# Altium PCB MODULIQ_TDC.PcbDoc (part 1 of 2)
Units mm, origin at the board's own origin, x right, y up, seen from the top; angles counter-clockwise.
Board outline 49.15 x 76.65 mm, 4 copper layers (L1, P2, L3, L4), stack 1.512 mm thick; 110 components, 101 nets, 467 pads, 506 vias.
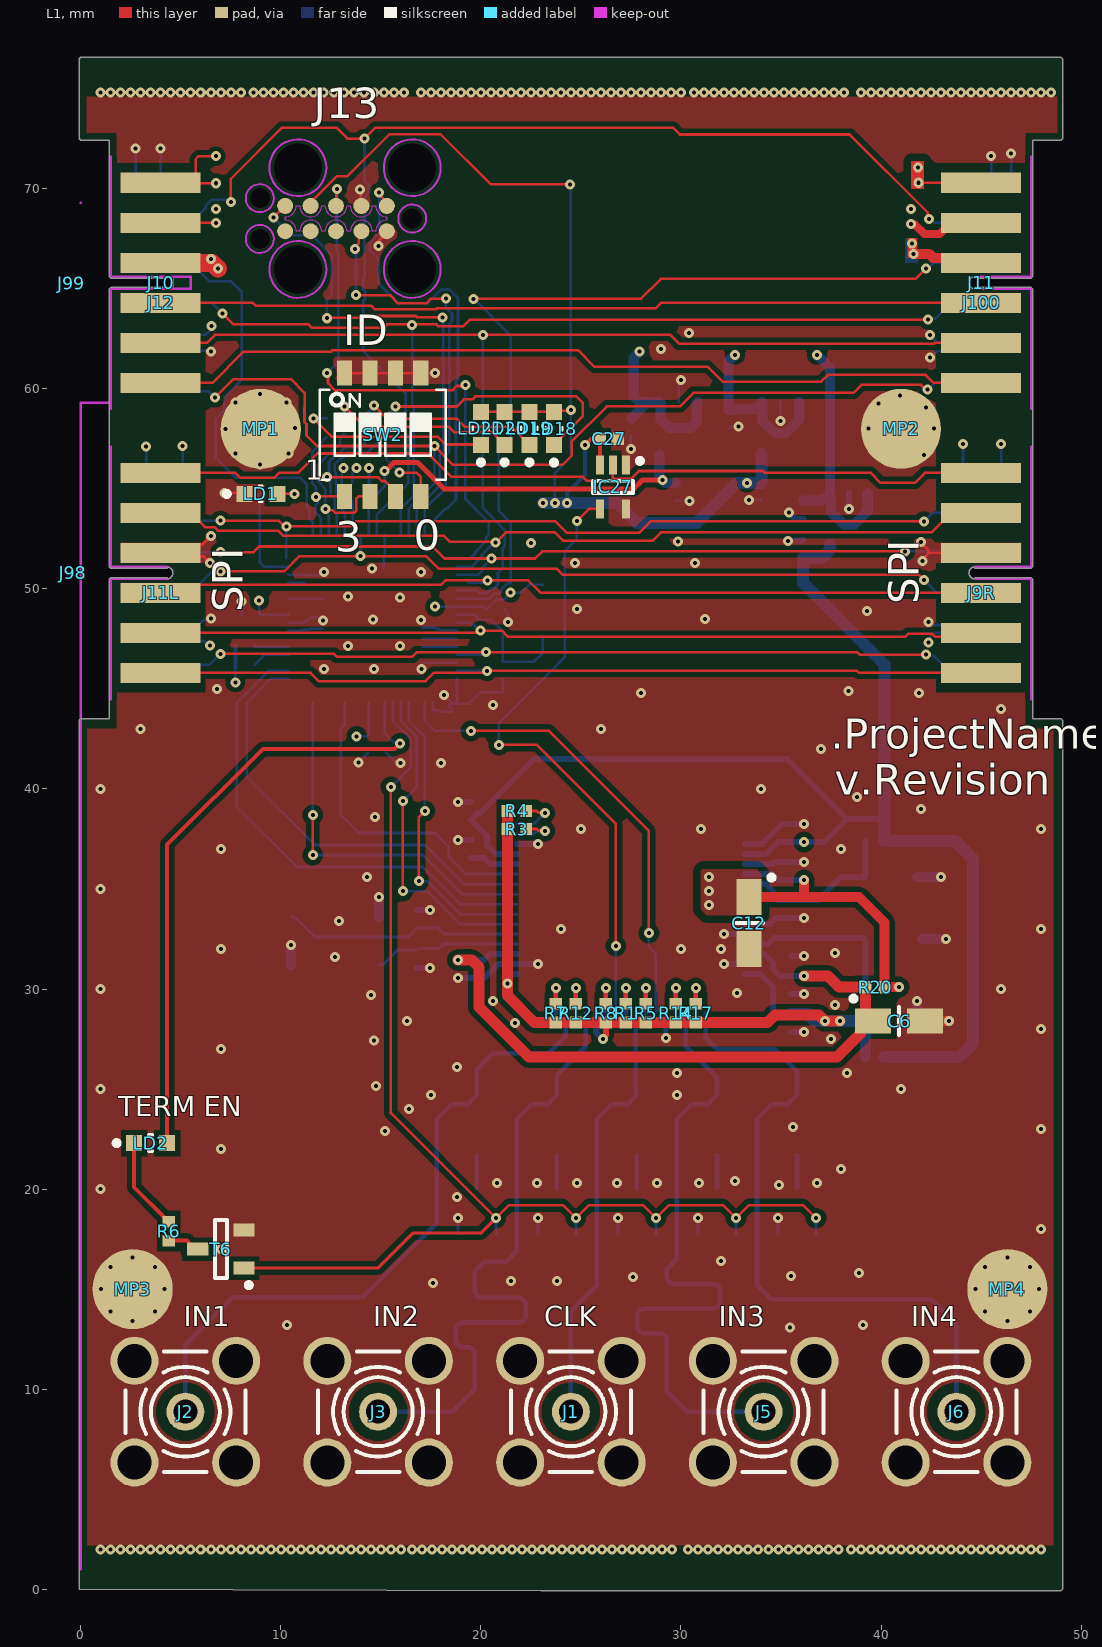
[diagram p0: L1 view]
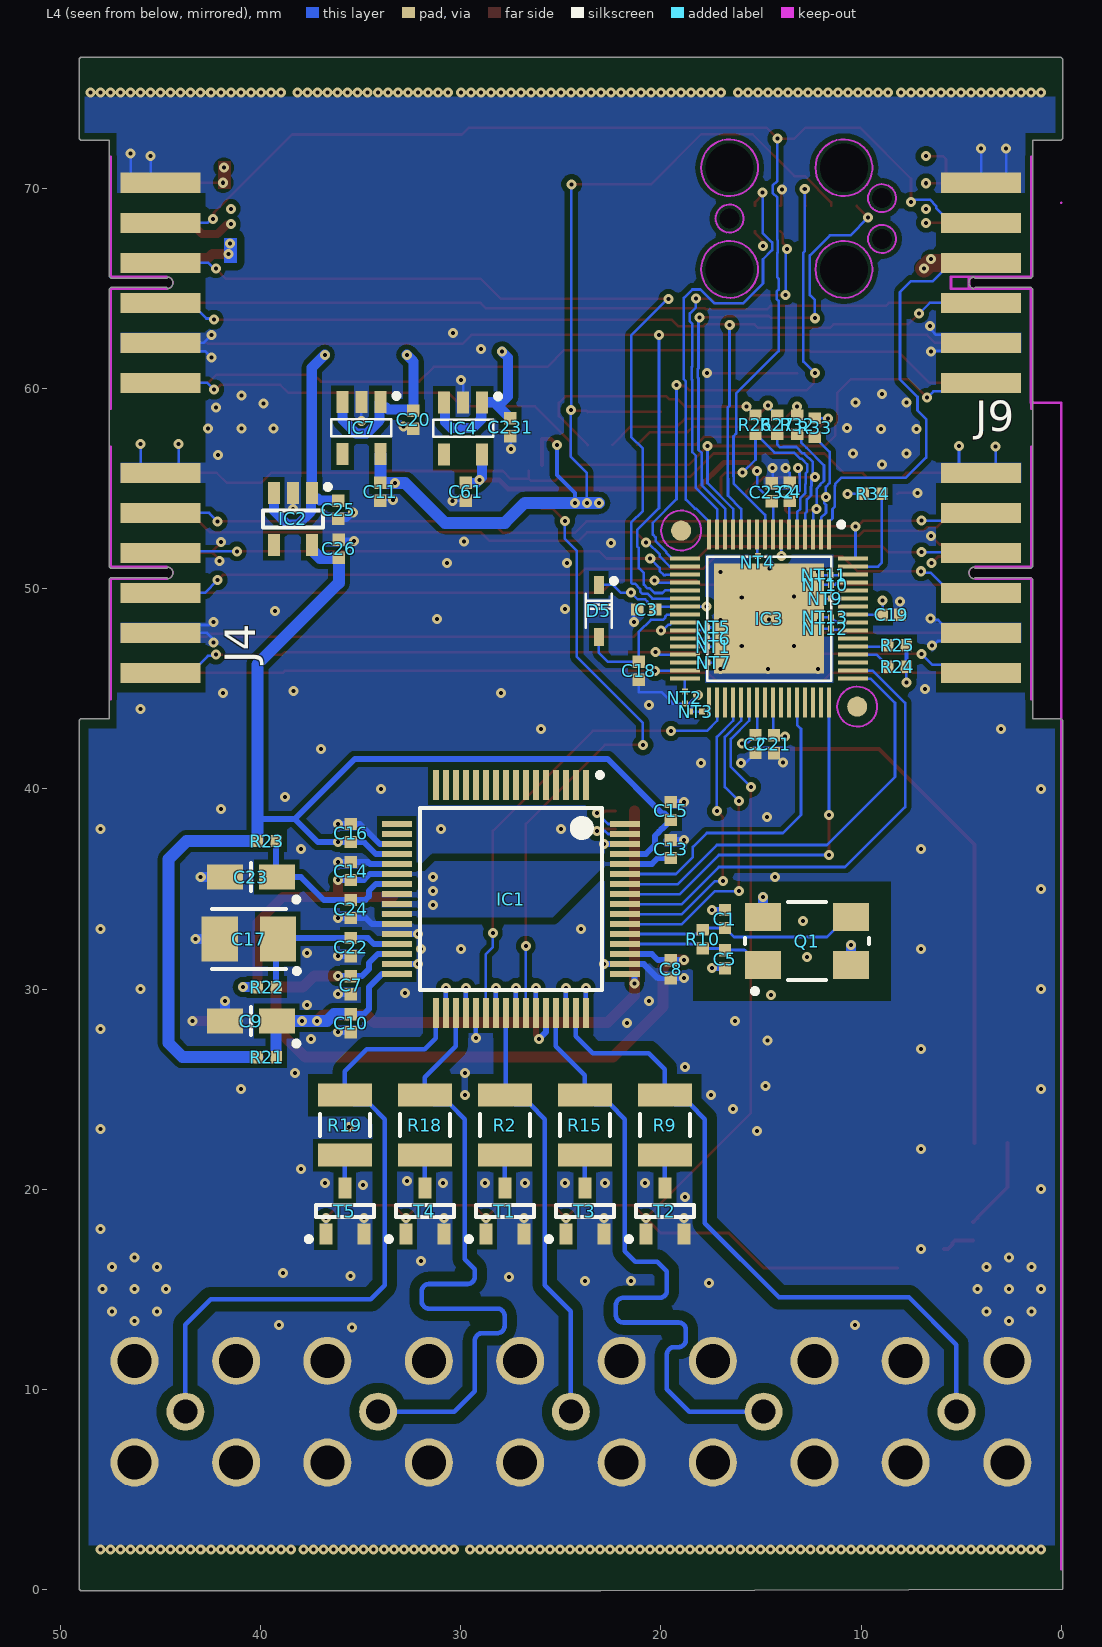
[diagram p1: L4 view, seen from below]
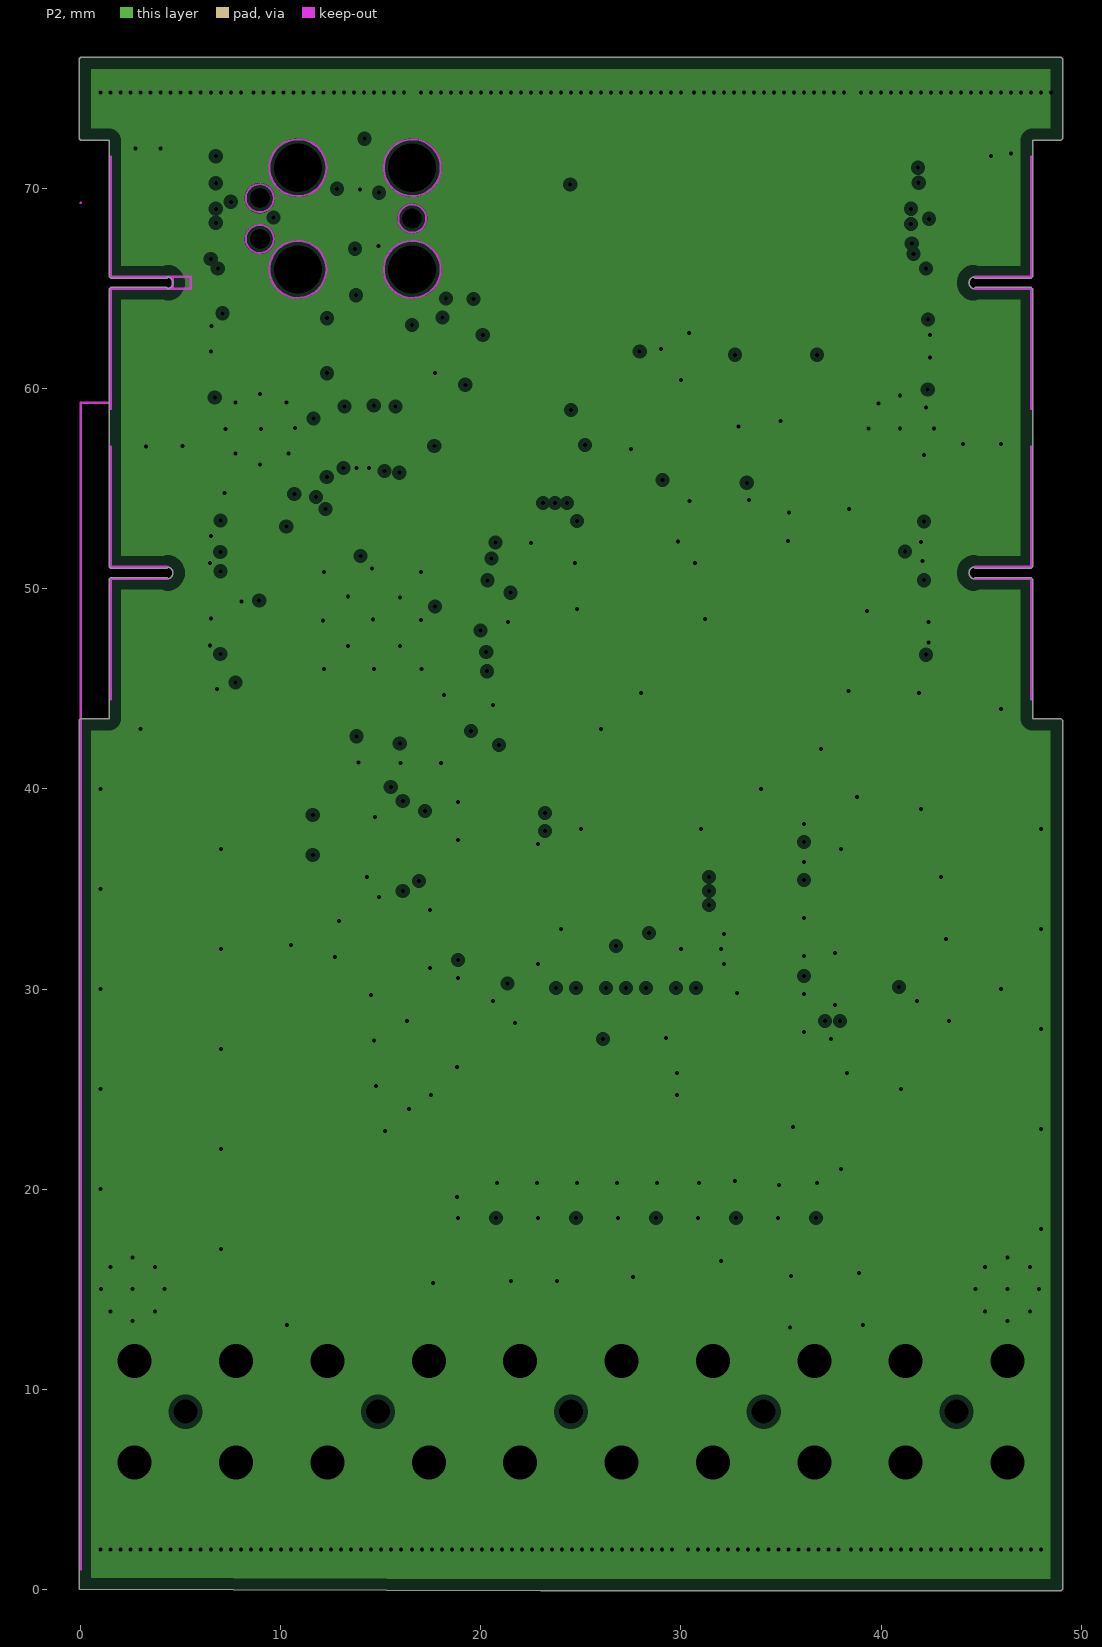
[diagram p2: P2, clearances drawn from the general rule]
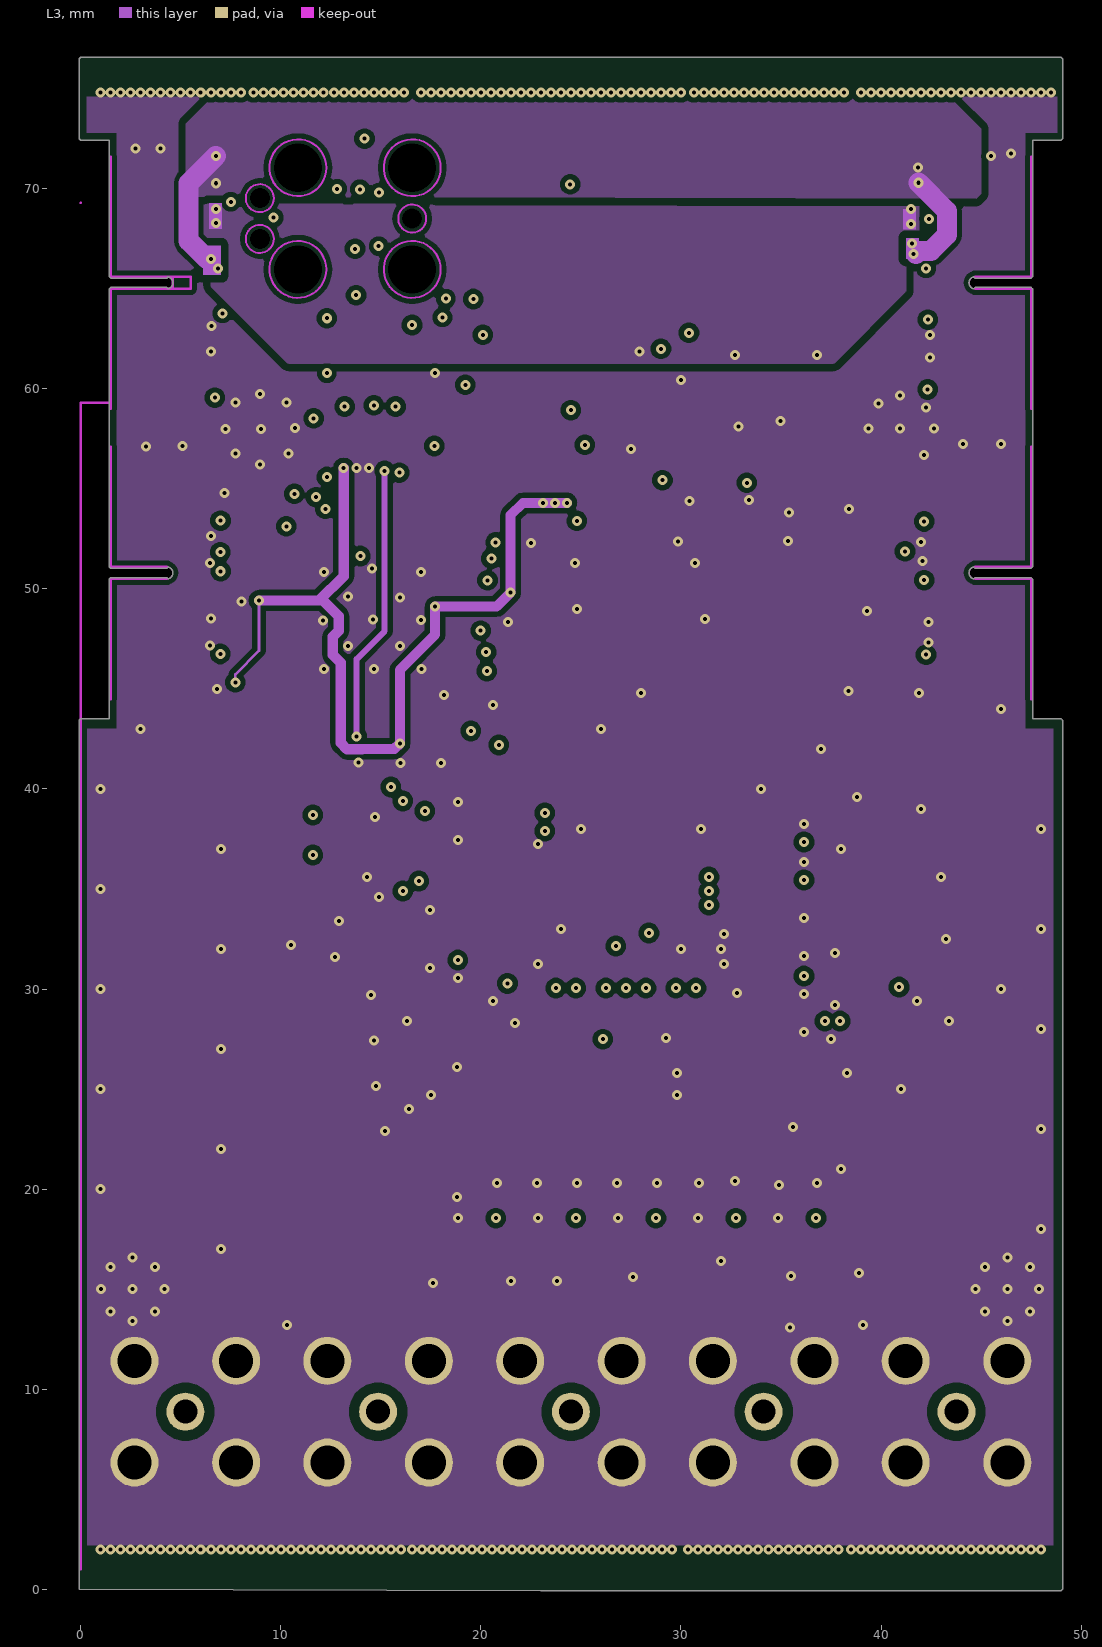
[diagram p3: L3]
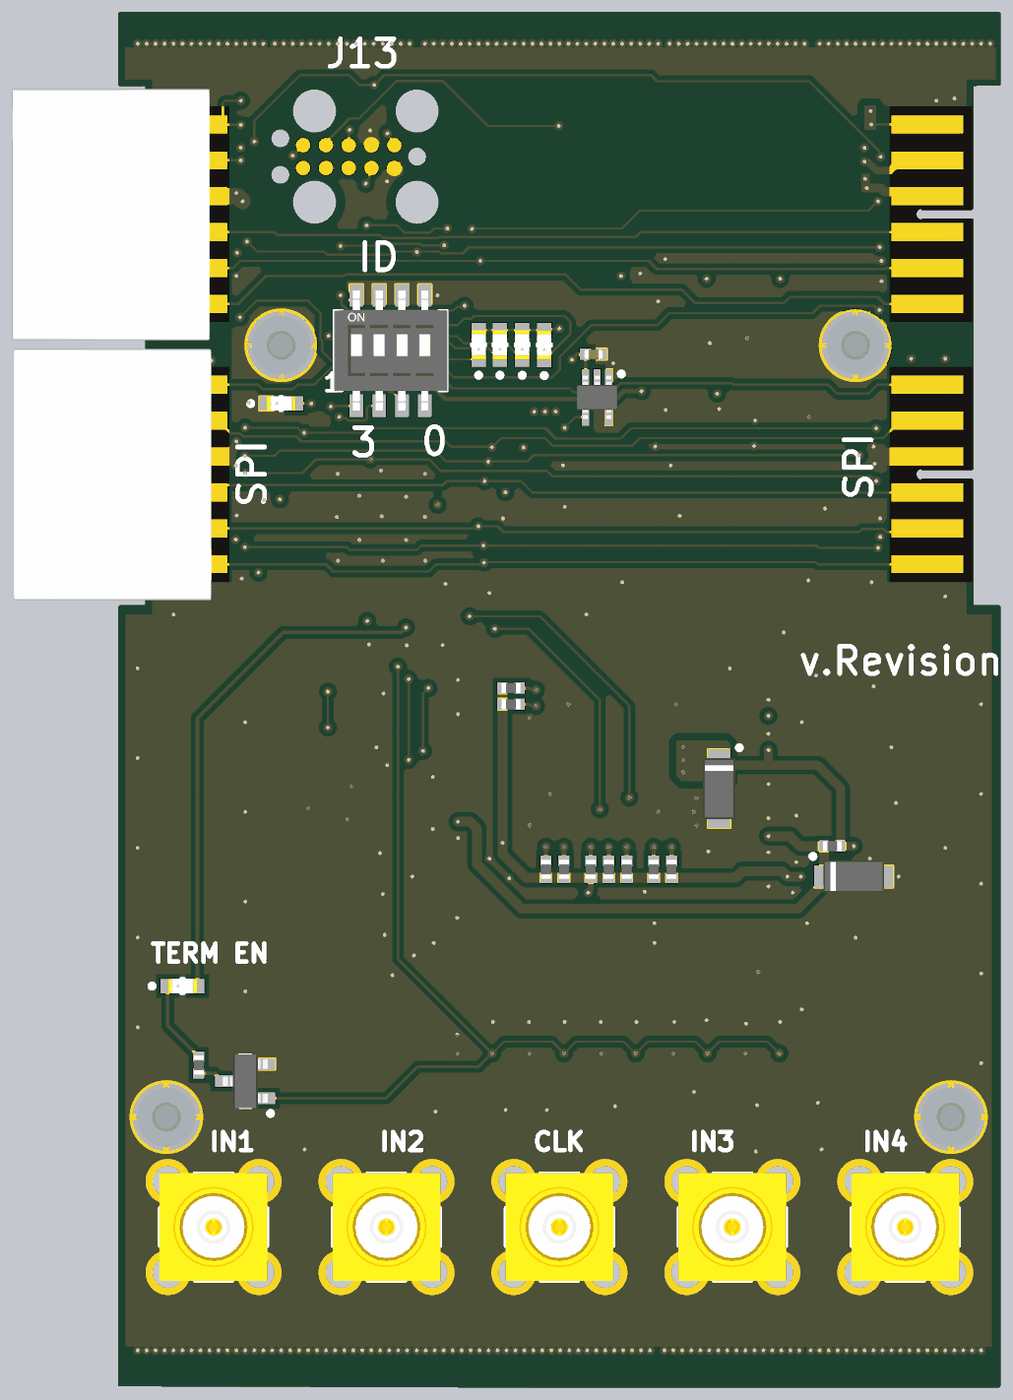
[diagram p5: 3D render of the assembled board from above, using the file's embedded part models]
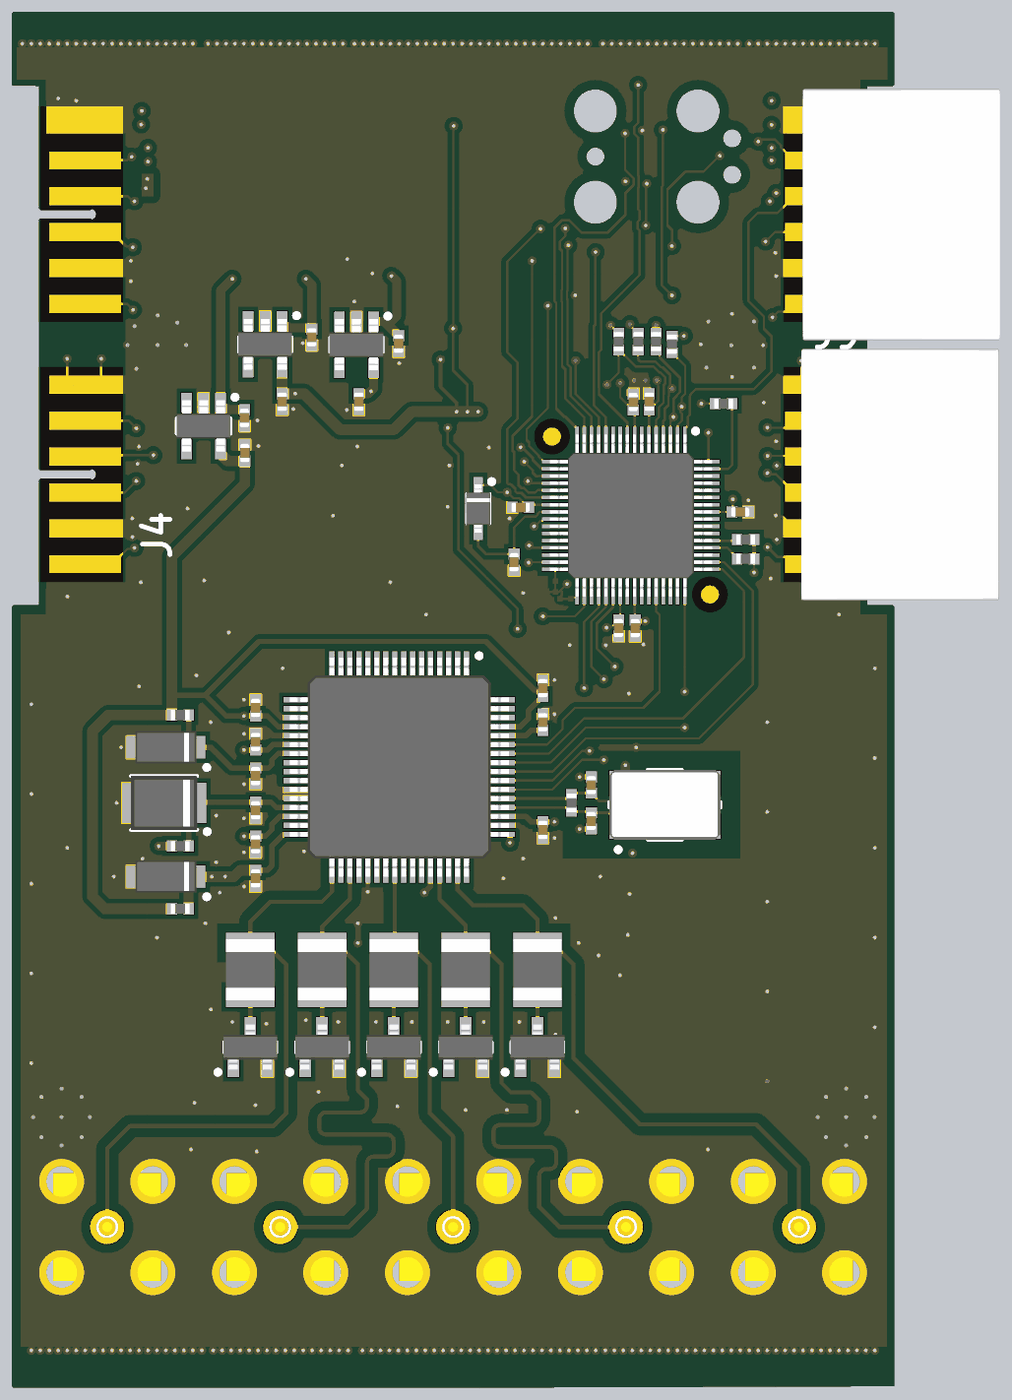
[diagram p6: 3D render of the assembled board from below, using the file's embedded part models]

## Layer stack, top to bottom
TopSolder: solder mask 0.025, Solder Resist, Dk 3.7
L1: signal copper 0.035
Dielectric1: core 0.138, FR-4, Dk 4.3
P2: plane copper 0.018, net GND
Dielectric3: core 1.13, FR-4, Dk 4.6
L3: signal copper 0.018
Dielectric5: core 0.138, FR-4, Dk 4.3
L4: signal copper 0.035
BottomSolder: solder mask 0.025, Solder Resist, Dk 3.7

## Board outline
-0.077,0 -0.077,43.44 0,43.517 1.423,43.517 1.423,50.49 1.5,50.567 4.3,50.567 4.375,50.505 ccw(c4.3,50.8) 4.605,50.8 ccw(c4.3,50.8) 4.375,51.095 4.3,51.033 1.5,51.033 1.423,51.11 1.423,57.1 1.423,64.99 1.5,65.067 4.3,65.067 4.375,65.005 ccw(c4.3,65.3) 4.605,65.3 ccw(c4.3,65.3) 4.375,65.595 4.3,65.533 1.5,65.533 1.423,65.61 1.423,72.423 0,72.423 -0.077,72.5 -0.077,76.5 0,76.577 49,76.577 49.077,76.5 49.077,72.5 49,72.423 47.577,72.423 47.577,65.61 47.5,65.533 44.7,65.533 44.625,65.595 ccw(c44.7,65.3) 44.625,65.005 44.7,65.067 47.5,65.067 47.577,64.99 47.577,59 47.577,51.11 47.5,51.033 44.7,51.033 44.625,51.095 ccw(c44.7,50.8) 44.625,50.505 44.7,50.567 47.5,50.567 47.577,50.49 47.577,43.517 49,43.517 49.077,43.44 49.077,0 49,-0.077 23,-0.077

## Design rules (kind name [scope] priority, off if disabled: settings)
Clearance Clearance_DIFF [(InDifferentialPairClass('All Differential Pairs'))] p1: gap=0.127 ignorepadtopadclearanceinfootprint=FALSE except(0: Arc-Hole Track-Hole SMDPad-Hole THPad-Hole Via-Hole Fill-Hole Poly-Hole Region-Hole Text-Hole; 0.254: Arc-Poly Track-Poly SMDPad-Poly THPad-Poly Via-Poly Fill-Poly Poly-Poly Poly-Region Poly-Text)
Clearance Clearance_S50 [InNetClass('S50')] p2: gap=0.127 ignorepadtopadclearanceinfootprint=FALSE except(0: Arc-Hole Track-Hole SMDPad-Hole THPad-Hole Via-Hole Fill-Hole Poly-Hole Region-Hole Text-Hole; 0.254: Poly-Region Poly-Text; 0.5: Arc-Poly Track-Poly SMDPad-Poly THPad-Poly Via-Poly Fill-Poly Poly-Poly)
Clearance [All] p3: gap=0.127 ignorepadtopadclearanceinfootprint=FALSE except(0: Arc-Hole Track-Hole SMDPad-Hole THPad-Hole Via-Hole Fill-Hole Poly-Hole Region-Hole Text-Hole; 0.254: Arc-Poly Track-Poly SMDPad-Poly Via-Poly; 0.381: THPad-Poly Fill-Poly Poly-Poly)
ComponentClearance [All] p1 off: gap=0.254 collisioncheckmode=3 verticalgap=0.254 showdistances=FALSE
DiffPairsRouting [All] p1: maxlimit=0.254 minlimit=0.127 mostfreqgap=0.127 toplayer_minwidth=0.127 toplayer_maxwidth=0.381 toplayer_prefwidth=0.254 midlayer1_minwidth=0.127 midlayer1_maxwidth=0.381 midlayer1_prefwidth=0.254 bottomlayer_minwidth=0.127 bottomlayer_maxwidth=0.381 bottomlayer_prefwidth=0.254 maxuncoupledlength=12.7
FabricationTestPointUsage TestPointUsage [All] p1: valid=0 allowmultiple=FALSE
FabricationTestpoint Testpoint [All] p1: side=3 testpointundercomponent=TRUE minsize=1.016 maxsize=2.54 preferedsize=1.524 minholesize=0.508 maxholesize=1.016 preferedholesize=0.813 testpointgrid=0.025 allowsidetop=TRUE allowsidebottom=TRUE usegrid=TRUE gridtolerance=0
Height [All] p1 off: minheight=0 maxheight=25.4 prefheight=12.7
HoleSize [All] p1: absolutevalues=TRUE maxlimit=3.81 minlimit=0.025 maxpercent=80.000 minpercent=20.000
HoleToHoleClearance [All] p1: gap=0.025 allowstackedmicrovias=TRUE
MatchedLengths MatchedLengths_TDC_IN [InNetClass('TDC_IN')] p1: tolerance=25.4 checknetsindiffpair=FALSE checkdiffpairvsdiffpair=TRUE checkxsignals=TRUE checkothers=TRUE usedelayunits=TRUE delaytolerance=10.000000
MinimumSolderMaskSliver [All] p1: minsoldermaskwidth=0
PlaneClearance [All] p1: clearance=0.254
PlaneConnect [All] p1: planeconnectstyle=Direct reliefexpansion=0.508 reliefentries=4 reliefconductorwidth=0.254 reliefairgap=0.254
PolygonConnect [All] p1: connectstyle=Direct reliefconductorwidth=0.254 reliefentries=4 polygonreliefangle="45 Angle" airgapwidth=0.254
RoutingVias [All] p1: holewidth=0.2 width=0.5 viastyle="Through Hole" minholewidth=0.2 minwidth=0.5 maxholewidth=1 maxwidth=2
SilkToSilkClearance [All] p1: silktosilkclearance=0
SilkToSolderMaskClearance SilkscreenOverComponentPads [IsPad] p1: minsilkscreentomaskgap=0 clearancetoexposedcopper=TRUE
SolderMaskExpansion [All] p1: expansion=0.051 istentingtop=FALSE
SupplyNets "Schematic Supply Nets_4" [InNet('DVDD33')] p1: voltage=0.000
SupplyNets "Schematic Supply Nets_2" [InNet('TVDD33')] p2: voltage=0.000
SupplyNets "Schematic Supply Nets_12" [InNet('P3V3')] p3: voltage=0.000
SupplyNets "Schematic Supply Nets" [InNet('P1V8')] p4: voltage=0.000
SupplyNets "Schematic Supply Nets_5" [InNet('GND')] p5: voltage=0.000
SupplyNets "Schematic Supply Nets_3" [InNet('P5V0')] p6: voltage=0.000
SupplyNets "Schematic Supply Nets_1" [InNet('P12V0')] p7: voltage=0.000
Width Width_S50 [InNetClass('S50')] p1: maxlimit=0.254 minlimit=0.23 preferedwidth=0.254 toplayer_maxwidth=0.23 toplayer_prefwidth=0.23 bottomlayer_maxwidth=0.23 bottomlayer_prefwidth=0.23 impedanceprofiledriven=TRUE impedanceprofileid={5AEEC51B-A12F-4C33-835D-7C136164C65C} impedanceprofilevalue=50.000000 minimp=50.000000 maximp=50.000000 favimp=50.000000
Width [All] p2: maxlimit=1.27 minlimit=0.127 preferedwidth=0.127
18 further rules are at their usual default settings.

## Classes and differential pairs
net class TDC_IN: TDC_STOP1 TDC_STOP2 TDC_STOP3 TDC_STOP4
net class S50: TDC_REFCLK TDC_STOP1 TDC_STOP2 TDC_STOP3 TDC_STOP4
component class MODULIQ_TDC: C1 C5 C6 C7 C8 C9 C10 C12 C13 C14 C15 C16 C17 C22 C23 C24 C27 IC1 IC27 J1 J2 J3 J5 J6 LD2 Q1 R1 R2 R3 R4 R5 R6 R7 R8 R9 R10 R12 R14 R15 R17 R18 R19 R20 R21 R22 R23 R24 R25 T1 T2 T3 T4 T5 T6
component class U_SPI_IFC: C2 C3 C4 C11 C18 C19 C20 C21 C25 C26 C61 C231 C232 D5 IC2 IC3 IC4 IC7 J4 J9 J9R J10 J11 J11L J12 J13 J98 J99 J100 LD1 LD18 LD19 LD20 LD21 MP1 MP2 MP3 MP4 NT1 NT2 NT3 NT4 NT5 NT6 NT7 NT9 NT10 NT11 NT12 NT13 R26 R27 R32 R33 R34 SW2

## Components (designator, comment, footprint, x,y, rotation, side; value= is the part's Value field where it differs from the comment)
C1 "18pF" CAPC1005X55N 16.8,33.5 r270 bottom
C2 "1uF" CAPC1005X55N 15.275,42.248 r90 bottom
C3 "1uF" CAPC1005X55N 20.741,48.97 r180 bottom
C4 "1uF" CAPC1005X55N 13.57,54.85 r270 bottom
C5 "18pF" CAPC1005X55N 16.8,31.5 r90 bottom
C6 "100uF" CAPMP3216X180N 40.9,28.4 r0 top
C7 "100nF" CAPC1005X55N 35.5,30.2 r90 bottom
C8 "100nF" CAPC1005X55N 19.5,31 r90 bottom
C9 "33uF" CAPMP3216X180N 40.5,28.4 r0 bottom
C10 "100nF" CAPC1005X55N 35.5,28.3 r90 bottom
C11 "1uF" CAPC1005X55N 34.019,54.85 r90 bottom
C12 "100uF" CAPMP3216X180N 33.4,33.3 r270 top
C13 "100nF" CAPC1005X55N 19.5,37 r270 bottom
C14 "100nF" CAPC1005X55N 35.5,35.9 r270 bottom
C15 "100nF" CAPC1005X55N 19.5,38.9 r270 bottom
C16 "100nF" CAPC1005X55N 35.5,37.8 r270 bottom
C17 "220uF" CAPMP3528X210N 40.6,32.5 r0 bottom
C18 "1uF" CAPC1005X55N 21.1,45.915 r90 bottom
C19 "1uF" CAPC1005X55N 8.5,48.715 r0 bottom
C20 "1uF" CAPC1005X55N 32.372,58.447 r90 bottom
C21 "1uF" CAPC1005X55N 14.35,42.238 r90 bottom
C22 "100nF" CAPC1005X55N 35.5,32.1 r90 bottom
C23 "33uF" CAPMP3216X180N 40.5,35.6 r0 bottom
C24 "100nF" CAPC1005X55N 35.5,34 r90 bottom
C25 "1uF" CAPC1005X55N 36.12,53.953 r90 bottom
C26 "1uF" CAPC1005X55N 36.1,52 r270 bottom
C27 "100nF" CAPC1005X55N 26.4,57.5 r180 top
C61 "1uF" CAPC1005X55N 29.752,54.85 r90 bottom
C231 "1uF" CAPC1005X55N 27.535,58.083 r90 bottom
C232 "1uF" CAPC1005X55N 14.46,54.835 r270 bottom
D5 "BAT165" SOD2512X110N 23.1,48.9 r270 bottom
IC1 "TDC-GPX2 FLQM" QFP50P1200X1200X160-64N 27.5,34.5 r270 bottom locked
IC2 "AP2112K-3.3TRG1" SOT95P285X140-5N 38.4,53.5 r270 bottom
IC3 "5M160ZE64A5N" QFP40P900X900X120-65N-S550 14.588,48.515 r270 bottom locked
IC4 "AP2112K-1.8TRG1" SOT95P285X140-5N 29.886,58.025 r270 bottom
IC7 "AP2112K-3.3TRG1" SOT95P285X140-5N 34.969,58.05 r270 bottom
IC27 "SN74LVC1G125DCKT" SOT65P210X110-5N 26.6,55.1 r270 top
J1 "MCX" AMPHENOL_919-109J-51PX 24.5,8.875 r0 top locked
J2 "MCX" AMPHENOL_919-109J-51PX 5.23,8.875 r0 top locked
J3 "MCX" AMPHENOL_919-109J-51PX 14.865,8.875 r0 top locked
J4 "" EDGE12T1B6_P200W1000L0F100X400 45,50.8 r270 bottom
J5 "MCX" AMPHENOL_919-109J-51PX 34.135,8.875 r0 top locked
J6 "MCX" AMPHENOL_919-109J-51PX 43.77,8.875 r0 top locked
J9 "" EDGE12T5B10_P200W1000L0F100X400 4,50.8 r90 bottom
J9R "" EDGE10T5B10_P200W1000L0F100X400 45,45.8 r90 top
J10 "" EDGE12T1B6_P200W1000L0F100X400 4,65.3 r270 top
J11 "" EDGE12T5B10_P200W1000L0F100X400 45,65.3 r90 top
J11L "" EDGE10T1B6_P200W1000L0F100X400 4,53.8 r270 top
J12 "" EDGE10T1B6_P200W1000L0F100X400 4,68.3 r270 top
J13 "TC2050-IDC" TC2050-IDC 12.76,68.51 r180 top
J98 "" AVX_009159012761916 -0.4,50.8 r180 top
J99 "" AVX_009159012761916 -0.475,65.275 r0 top
J100 "" EDGE10T5B10_P200W1000L0F100X400 45,60.3 r90 top
LD1 "Green" LED_KINGBRIGHT_KP-1608CGCK 9,54.75 r0 top
LD2 "Green" LED_KINGBRIGHT_KP-1608CGCK 3.5,22.3 r0 top
LD18 "Green" LED_KINGBRIGHT_KP-1608CGCK 23.656,58.013 r90 top
LD19 "Green" LED_KINGBRIGHT_KP-1608CGCK 22.427,58.028 r90 top
LD20 "Green" LED_KINGBRIGHT_KP-1608CGCK 21.185,58.028 r90 top
LD21 "Green" LED_KINGBRIGHT_KP-1608CGCK 20,58.028 r90 top
MP1 "M1.6 x 3mm" 97730306330 9,58 r0 top
MP2 "M1.6 x 3mm" 97730306330 41,58 r0 top
MP3 "M1.6 x 3mm" 97730306330 2.6,15 r0 top
MP4 "M1.6 x 3mm" 97730306330 46.315,15 r0 top
NT1 "Net Tie" "Net Tie 3" 17.688,47.115 r180 bottom net-tie
NT2 "Net Tie" "Net Tie 3" 18.808,44.865 r270 bottom net-tie
NT3 "Net Tie" "Net Tie 3" 17.95,43.865 r0 bottom net-tie
NT4 "Net Tie" "Net Tie 3" 15.156,51.642 r270 bottom net-tie
NT5 "Net Tie" "Net Tie 3" 17.688,48.072 r180 bottom net-tie
NT6 "Net Tie" "Net Tie 3" 17.688,47.515 r180 bottom net-tie
NT7 "Net Tie" "Net Tie 3" 17.67,46.315 r180 bottom net-tie
NT9 "Net Tie" "Net Tie 3" 11.488,49.515 r0 bottom net-tie
NT10 "Net Tie" "Net Tie 3" 11.488,50.2 r0 bottom net-tie
NT11 "Net Tie" "Net Tie 3" 11.525,50.685 r0 bottom net-tie
NT12 "Net Tie" "Net Tie 3" 11.488,48.015 r0 bottom net-tie
NT13 "Net Tie" "Net Tie 3" 11.488,48.575 r0 bottom net-tie
Q1 "10MHZ" XTAL_ABRACON_ABMM2 12.7,32.4 r90 bottom
R1 "100k" RESC1005X40N 27.25,28.8 r270 top
R2 "49R9" RESC3225X70N 27.8,23.2 r90 bottom
R3 "100k" RESC1005X40N 21.8,38 r180 top
R4 "100k" RESC1005X40N 21.8,38.9 r180 top
R5 "100k" RESC1005X40N 28.25,28.8 r270 top
R6 "3k3" RESC1005X40N 4.4,17.9 r270 top
R7 "100k" RESC1005X40N 23.75,28.8 r270 top
R8 "100k" RESC1005X40N 26.25,28.8 r270 top
R9 "49R9" RESC3225X70N 19.8,23.2 r90 bottom
R10 "1M" RESC1005X40N 17.9,32.5 r270 bottom
R12 "100k" RESC1005X40N 24.75,28.8 r270 top
R14 "100k" RESC1005X40N 29.75,28.8 r270 top
R15 "49R9" RESC3225X70N 23.8,23.2 r90 bottom
R17 "100k" RESC1005X40N 30.75,28.8 r270 top
R18 "49R9" RESC3225X70N 31.8,23.2 r90 bottom
R19 "49R9" RESC3225X70N 35.8,23.2 r90 bottom
R20 "10" RESC1005X40N 39.7,30.1 r180 top
R21 "10" RESC1005X40N 39.7,26.6 r180 bottom
R22 "10" RESC1005X40N 39.7,30.1 r180 bottom
R23 "10" RESC1005X40N 39.7,37.4 r180 bottom
R24 "3k3" RESC1005X40N 8.2,46.1 r0 bottom
R25 "3k3" RESC1005X40N 8.2,47.175 r0 bottom
R26 "3k3" RESC1005X40N 15.275,58.205 r270 bottom
R27 "3k3" RESC1005X40N 14.185,58.205 r270 bottom
R32 "3k3" RESC1005X40N 13.19,58.205 r270 bottom
R33 "3k3" RESC1005X40N 12.303,58.052 r270 bottom
R34 "3k3" RESC1005X40N 9.425,54.75 r180 bottom
SW2 "Switch" SW_OMRON_A6H-4102 15.095,57.705 r90 top
T1 "2N7002" SOT95P240X130-3N 27.8,18.9 r90 bottom
T2 "2N7002" SOT95P240X130-3N 19.8,18.9 r90 bottom
T3 "2N7002" SOT95P240X130-3N 23.8,18.9 r90 bottom
T4 "2N7002" SOT95P240X130-3N 31.8,18.9 r90 bottom
T5 "2N7002" SOT95P240X130-3N 35.8,18.9 r90 bottom
T6 "2N7002" SOT95P240X130-3N 7,17 r180 top

## Footprints (in the part's own frame and the unit in brackets; to place one, negate y for a bottom-side part, rotate by r counter-clockwise, add the part's x,y. Pads: shape width x height; smd on the part's side, far side on the other; paste and mask are expansions set on the pad)
97730306330 [mm] "SMT Steel Spacer with internal Thread M1.6 Bottom closed, height 3mm"
  round 4 smd paste-2539.97: 1(0,0)
  body extent -1.65,-1.65 1.65,1.65, height 3
AMPHENOL_919-109J-51PX [mm] "50 Ohm, RF Connector, MCX Straight PCB Receptacle Jack"
  round 1.9 hole 1.2: 1(0,0)
  round 2.4 hole 1.7: 2(-2.54,-2.54) 2(-2.54,2.54) 2(2.54,-2.54) 2(2.54,2.54)
  silkscreen extent -3,-3 3,3, body extent -3,-3 3,3, height 6.06
AVX_009159012761916 [mm] "12 Contacts, 2mm Pitch, Open Ended Card Edge Connector, 9159 Series"
  body extent -5.5,-7 5.5,7, height 2.9
CAPC1005X55N [mm] "Capacitor, Non-Polarized, Chip; 1.00mm L X 0.50mm W X 0.70mm H, IPC Medium Density"
  rect 0.62x0.62 smd: 1(-0.45,0) 2(0.45,0)
  body extent -0.52,-0.27 0.53,0.28, height 0.55
CAPMP3216X180N [mm] "Capacitor, Polarized, Molded  Body 3.2x1.6mm, IPC Medium Density"
  rect 1.8x1.25 smd: 1(-1.3,0) 2(1.3,0)
  silkscreen extent -2.4,-0.7 0,1.25, body extent -1.7,-0.9 1.7,0.9, height 1.6
CAPMP3528X210N [mm] "Capacitor, Polarized, Molded  Body 3.5x2.8mm, IPC Medium Density"
  rect 1.8x2.25 smd: 1(-1.45,0) 2(1.45,0)
  silkscreen extent -2.52,-1.5 1.85,1.72, body extent -1.85,-1.5 1.85,1.5, height 2.1
EDGE10T1B6_P200W1000L0F100X400 [mm] "10 contacts Board Edge Connector, First Left Top Pad 1, First Left Bottom Pad 2, Pitch 2mm, Length 0mm, Width 10mm, Finger Lenght 4mm, Finger Width 1mm"
  rect 1x4 smd paste-0.5: 1(0,0) 2(2,0) 3(4,0) 4(6,0) 5(8,0)
  rect 1x4 smd far side paste-0.5: 6(0,0) 7(2,0) 8(4,0) 9(6,0) 10(8,0)
  KeepOutLayer lines w0.05: 3.3,0.3 ccw(c3,0.3) 2.7,0.3
  KeepOutLayer lines w0.13: 9,-2.5 3.3,-2.5 3.3,0.3 ; -1,-2.5 2.7,-2.5 2.7,0.3
EDGE10T5B10_P200W1000L0F100X400 [mm] "10 contacts Board Edge Connector, First Left Top Pad 5, First Left Bottom Pad 10, Pitch 2mm, Length 0mm, Width 10mm, Finger Lenght 4mm, Finger Width 1mm"
  rect 1x4 smd paste-0.5: 1(8,0) 2(6,0) 3(4,0) 4(2,0) 5(0,0)
  rect 1x4 smd far side paste-0.5: 6(8,0) 7(6,0) 8(4,0) 9(2,0) 10(0,0)
  KeepOutLayer lines w0.05: 4.7,0.3 cw(c5,0.3) 5.3,0.3
  KeepOutLayer lines w0.13: 4.7,0.3 4.7,-2.5 -1,-2.5 ; 5.3,0.3 5.3,-2.5 9,-2.5
EDGE12T1B6_P200W1000L0F100X400 [mm] "12 contacts Board Edge Connector, First Left Top Pad 1, First Left Bottom Pad 2, Pitch 2mm, Length 0mm, Width 12.5mm, Finger Lenght 4mm, Finger Width 1mm"
  rect 1x4 smd paste-0.5: 1(-5,0) 2(-3,0) 3(-1,0) 4(1,0) 5(3,0) 6(5,0)
  rect 1x4 smd far side paste-0.5: 7(-5,0) 8(-3,0) 9(-1,0) 10(1,0) 11(3,0) 12(5,0)
  KeepOutLayer lines w0.05: 0.3,0.3 ccw(c0,0.3) -0.3,0.3
  KeepOutLayer lines w0.13: 0.3,0.3 0.3,-2.5 6.3,-2.5 ; -0.3,0.3 -0.3,-2.5 -6.3,-2.5
EDGE12T5B10_P200W1000L0F100X400 [mm] "12 contacts Board Edge Connector, First Left Top Pad 5, First Left Bottom Pad 10, Pitch 2mm, Length 0mm, Width 12.5mm, Finger Lenght 4mm, Finger Width 1mm"
  rect 1x4 smd paste-0.5: 1(5,0) 2(3,0) 3(1,0) 4(-1,0) 5(-3,0) 6(-5,0)
  rect 1x4 smd far side paste-0.5: 7(5,0) 8(3,0) 9(1,0) 10(-1,0) 11(-3,0) 12(-5,0)
  KeepOutLayer lines w0.05: -0.3,0.3 cw(c0,0.3) 0.3,0.3
  KeepOutLayer lines w0.13: -6.3,-2.5 -0.3,-2.5 -0.3,0.3 ; 6.3,-2.5 0.3,-2.5 0.3,0.3
LED_KINGBRIGHT_KP-1608CGCK [mm] "SMT Green LED, Case 0603, Body L 1.60mm x W 0.80mm x H 1.10mm"
  rect 0.8x0.8 smd: 1(-0.825,0) 2(0.825,0)
  silkscreen extent -1.82,-0.4 0.08,0.4, body extent -0.8,-0.4 0.8,0.4, height 1.1
"Net Tie 3" [mm] "SMD Net Tie"
  rect 0.3x0.3 smd paste-2539.97 mask-0.064: 1(0,0) 2(0.6,0)
  L1 lines w0.13: 0.6,0 0,0
QFP40P900X900X120-65N-S550 [mm] "QFP, 0.40mm Pitch, Square; 64 Pin, 7.00mm L X 7.00mm W X 1.20mm H Body (w/Thermal Tab), IPC Medium Density"
  rect 1.5x0.2 smd: 1(-4.2,3) 2(-4.2,2.6) 3(-4.2,2.2) 4(-4.2,1.8) 5(-4.2,1.4) 6(-4.2,1) 7(-4.2,0.6) 8(-4.2,0.2) 9(-4.2,-0.2) 10(-4.2,-0.6) 11(-4.2,-1) 12(-4.2,-1.4) 13(-4.2,-1.8) 14(-4.2,-2.2) 15(-4.2,-2.6) 16(-4.2,-3) 33(4.2,-3) 34(4.2,-2.6) 35(4.2,-2.2) 36(4.2,-1.8) 37(4.2,-1.4) 38(4.2,-1) 39(4.2,-0.6) 40(4.2,-0.2) 41(4.2,0.2) 42(4.2,0.6) 43(4.2,1) 44(4.2,1.4) 45(4.2,1.8) 46(4.2,2.2) 47(4.2,2.6) 48(4.2,3)
  rect 0.2x1.5 smd: 17(-3,-4.2) 18(-2.6,-4.2) 19(-2.2,-4.2) 20(-1.8,-4.2) 21(-1.4,-4.2) 22(-1,-4.2) 23(-0.6,-4.2) 24(-0.2,-4.2) 25(0.2,-4.2) 26(0.6,-4.2) 27(1,-4.2) 28(1.4,-4.2) 29(1.8,-4.2) 30(2.2,-4.2) 31(2.6,-4.2) 32(3,-4.2) 49(3,4.2) 50(2.6,4.2) 51(2.2,4.2) 52(1.8,4.2) 53(1.4,4.2) 54(1,4.2) 55(0.6,4.2) 56(0.2,4.2) 57(-0.2,4.2) 58(-0.6,4.2) 59(-1,4.2) 60(-1.4,4.2) 61(-1.8,4.2) 62(-2.2,4.2) 63(-2.6,4.2) 64(-3,4.2)
  rect 5.5x5.5 smd: 65(0,0)
  round 1 smd paste-0.51 mask+0.5: FTG1(-4.4,-4.4) FTG2(4.4,4.4)
  L1 keep-out circle w0.1: c4.4,4.4 r1
  L1 keep-out circle w0.1: c-4.4,-4.4 r1
  silkscreen extent -4.82,-3.1 3.1,3.72, body extent -4.52,-4.52 4.52,4.52, height 1.2
QFP50P1200X1200X160-64N [mm] "QFP, 0.50mm Pitch, Square; 16 Pin X 16 Pin, 10.00mm X 10.00mm X 1.60mm Body, IPC Medium Density"
  rect 1.5x0.3 smd: 1(-5.7,3.75) 2(-5.7,3.25) 3(-5.7,2.75) 4(-5.7,2.25) 5(-5.7,1.75) 6(-5.7,1.25) 7(-5.7,0.75) 8(-5.7,0.25) 9(-5.7,-0.25) 10(-5.7,-0.75) 11(-5.7,-1.25) 12(-5.7,-1.75) 13(-5.7,-2.25) 14(-5.7,-2.75) 15(-5.7,-3.25) 16(-5.7,-3.75) 33(5.7,-3.75) 34(5.7,-3.25) 35(5.7,-2.75) 36(5.7,-2.25) 37(5.7,-1.75) 38(5.7,-1.25) 39(5.7,-0.75) 40(5.7,-0.25) 41(5.7,0.25) 42(5.7,0.75) 43(5.7,1.25) 44(5.7,1.75) 45(5.7,2.25) 46(5.7,2.75) 47(5.7,3.25) 48(5.7,3.75)
  rect 0.3x1.5 smd: 17(-3.75,-5.7) 18(-3.25,-5.7) 19(-2.75,-5.7) 20(-2.25,-5.7) 21(-1.75,-5.7) 22(-1.25,-5.7) 23(-0.75,-5.7) 24(-0.25,-5.7) 25(0.25,-5.7) 26(0.75,-5.7) 27(1.25,-5.7) 28(1.75,-5.7) 29(2.25,-5.7) 30(2.75,-5.7) 31(3.25,-5.7) 32(3.75,-5.7) 49(3.75,5.7) 50(3.25,5.7) 51(2.75,5.7) 52(2.25,5.7) 53(1.75,5.7) 54(1.25,5.7) 55(0.75,5.7) 56(0.25,5.7) 57(-0.25,5.7) 58(-0.75,5.7) 59(-1.25,5.7) 60(-1.75,5.7) 61(-2.25,5.7) 62(-2.75,5.7) 63(-3.25,5.7) 64(-3.75,5.7)
  silkscreen extent -6.32,-4.55 4.55,4.57, body extent -6.1,-6.1 6.1,6.1, height 1.6
RESC1005X40N [mm] "Chip Resistor, EIA 0402, Metric 1005, Body 1.0x0.5mm, IPC Medium Density"
  rect 0.58x0.62 smd: 1(-0.47,0) 2(0.47,0)
  body extent -0.52,-0.27 0.53,0.28, height 0.4
RESC3225X70N [mm] "Chip Resistor, EIA 1210, Metric 3225, Body 3.2x2.5mm, IPC Medium Density"
  rect 1.15x2.7 smd: 1(-1.5,0) 2(1.5,0)
  silkscreen extent -0.55,-1.25 0.55,1.25, body extent -1.7,-1.35 1.7,1.35, height 0.7
SOD2512X110N [mm] "Small Outline Diode (SOD-323), 1.70mm W X 1.25mm L X 1.10mm H body,  IPC Medium Density"
  rect 0.9x0.5 smd: 1(-1.3,0) 2(1.3,0)
  silkscreen extent -1.62,-0.65 0.85,0.87, body extent -1.35,-0.67 1.35,0.68, height 1.1
SOT65P210X110-5N [mm] "SOT353, SC70-5, SOT, 0.65mm Pitch, 5 Pin, 1.25mm W X 2.00mm L X 1.10mm H, IPC Medium Density"
  rect 0.95x0.4 smd: 1(-1.1,0.65) 2(-1.1,0) 3(-1.1,-0.65) 4(1.1,-0.65) 5(1.1,0.65)
  silkscreen extent -1.42,-1 0.3,1.48, body extent -1.2,-1.1 1.2,1.1, height 1.1
SOT95P240X130-3N [mm] "SOT23 3-Leads, Pitch 0.95mm - Body 1.3x2.9mm, IPC Medium Density"
  rect 1.05x0.65 smd: 1(-1.15,0.95) 2(-1.15,-0.95) 3(1.15,0)
  silkscreen extent -1.52,-1.45 0.3,1.92, body extent -1.25,-1.5 1.25,1.5, height 1.3
SOT95P285X140-5N [mm] "SOT23, 5-Leads, Body 3.00x2.85mm, Pitch 0.95mm, IPC Medium Density"
  rect 1.1x0.6 smd: 1(-1.3,0.95) 2(-1.3,0) 3(-1.3,-0.95) 4(1.3,-0.95) 5(1.3,0.95)
  silkscreen extent -1.72,-1.5 0.42,1.87, body extent -1.43,-1.5 1.43,1.5, height 1.4
SW_OMRON_A6H-4102 [mm] "Pitch 1.27mm, Body 6.31 x 4.5mm, 4 Ways SPST Surface-Mounting DIP Switch, OMRON A6H"
  rect 1.25x0.76 smd: 1(-3.075,1.905) 2(-3.075,0.635) 3(-3.075,-0.635) 4(-3.075,-1.905) 5(3.075,-1.905) 6(3.075,-0.635) 7(3.075,0.635) 8(3.075,1.905)
  silkscreen extent -2.25,-3.16 2.25,3.16, body extent -3.35,-3.15 3.35,3.16, height 1.55
TC2050-IDC [mm] "TAG-CONNECT IN-CIRCUIT Cable Legged"
  round 0.8 smd paste-0.4: 1(-2.54,-0.635) 2(-1.27,-0.635) 3(0,-0.635) 4(1.27,-0.635) 5(2.54,-0.635) 6(2.54,0.635) 7(1.27,0.635) 8(0,0.635) 9(-1.27,0.635) 10(-2.54,0.635)
  round 0.5 hole 2.4 unplated mask+0.95: Mech(-3.81,-2.54) Mech(-3.81,2.54) Mech(1.905,2.54) Mech(1.905,-2.54)
  round 0.5 hole 1 unplated mask+0.25: Mech(-3.81,0) Mech(3.81,-1.016) Mech(3.81,1.016)
  L1 keep-out region: -2.54,0.085 -2.33,0.127 -2.151,0.246 -2.032,0.425 -1.99,0.635 -1.99,0.635 -1.82,0.635 -1.778,0.425 -1.659,0.246 -1.48,0.127 -1.27,0.085 -1.27,0.085 -1.06,0.127 -0.881,0.246 -0.762,0.425 -0.72,0.635 -0.72,0.635 -0.55,0.635 -0.508,0.425 -0.389,0.246 -0.21,0.127 0,0.085 0,0.085 0.21,0.127 0.389,0.246 0.508,0.425 0.55,0.635 0.55,0.635 0.72,0.635 0.72,0.615 0.76,0.413 0.875,0.241 1.047,0.126 1.25,0.085 1.25,0.085 1.27,0.085 1.481,0.127 1.659,0.246 1.778,0.425 1.82,0.635 1.82,0.635 1.99,0.635 2.032,0.425 2.151,0.246 2.33,0.127 2.54,0.085 2.54,0.085 2.54,-0.085 2.33,-0.127 2.151,-0.246 2.032,-0.425 1.99,-0.635 1.99,-0.635 1.82,-0.635 1.778,-0.425 1.659,-0.246 1.48,-0.127 1.27,-0.085 1.27,-0.085 1.06,-0.127 0.881,-0.246 0.762,-0.425 0.72,-0.635 0.72,-0.635 0.55,-0.635 0.508,-0.425 0.389,-0.246 0.21,-0.127 0,-0.085 0,-0.085 -0.21,-0.127 -0.389,-0.246 -0.508,-0.425 -0.55,-0.635 -0.55,-0.635 -0.72,-0.635 -0.72,-0.615 -0.76,-0.413 -0.875,-0.241 -1.047,-0.126 -1.25,-0.085 -1.25,-0.085 -1.27,-0.085 -1.481,-0.127 -1.659,-0.246 -1.778,-0.425 -1.82,-0.635 -1.82,-0.635 -1.99,-0.635 -2.032,-0.425 -2.151,-0.246 -2.33,-0.127 -2.54,-0.085 -2.54,-0.085
XTAL_ABRACON_ABMM2 [mm] "4 Pins,  6mm L X 3.5mm H, SMD Low Profile Crystal, ABMM2 Serie"
  rect 1.4x1.8 smd: 1(-1.2,2.2) 2(-1.2,-2.2) 3(1.2,-2.2) 4(1.2,2.2)
  silkscreen extent -2.62,-3.1 1.95,3.1, body extent -1.95,-3.1 1.95,3.1, height 1.2

## Part data
C1 C5: library part CC0402_18PF_50V_5%_C0G, "Non-polarised capacitor", Case=0402, Manufacturer=GENERIC, Manufacturer1 ComponentHeight=0.55mm, Manufacturer1 Example=KEMET, Manufacturer1 Part Number=C0402C180J5GACTU, Tolerance=±5%, Voltage=50V, Author="CERN DEM JLC", Component Type=Standard, CreateDate=10/4/2016, HelpURL="\\cern.ch\dfs\Applications\Altium\Datasheets\CC0402_C0G_KEMET_(Commercial Grade).pdf", LatestRevisionDate=10/4/2016, Manufacturer Part Number=CC0402_18PF_50V_5%_C0G, Mounted=Yes, Part Description="SMD Multilayer Chip Ceramic Capacitor", Part Number=CC0402_18PF_50V_5%_C0G, Pin Count=2, Sense=No, SMD=Yes, Socket=No, Status=Preferred, TC=C0G/NP0
C2 C3 C4 C11 C18 C19 C20 C21 C25 C26 C61 C231 C232: library part CC0402_1UF_16V_10%_X5R, "Non-polarised capacitor", Case=0402, Manufacturer=GENERIC, Manufacturer1 ComponentHeight=0.55mm, Manufacturer1 Example=TDK, Manufacturer1 Part Number=C1005X5R1C105KT, Tolerance=±10%, Voltage=16V, Author="CERN DEM JLC", Component Type=Standard, CreateDate=25.10.2012, HelpURL=\\cern.ch\dfs\Applications\Altium\Datasheets\CC0402_X5R_TDK_C.pdf, LatestRevisionDate=25.10.2012, Manufacturer Part Number=CC0402_1UF_16V_10%_X5R, Mounted=Yes, Part Description="SMD Multilayer Chip Ceramic Capacitor", Part Number=CC0402_1UF_16V_10%_X5R, Pin Count=2, Sense=No, SMD=Yes, Socket=No, Status=Preferred, TC=X5R
C6 C12: library part CTE3216-18_100UF_6.3V_20%_ESR0500_AVX_TLJ, "Polarised capacitor", Case=A, Manufacturer=AVX, Manufacturer Part Number=TLJA107M006R0500, Tolerance=±20%, Voltage=6.3V, Author="CERN DEM JLC", Component Type=Standard, ComponentHeight=1.8mm, CreateDate=19.12.2013, HelpURL=\\cern.ch\dfs\Applications\Altium\Datasheets\CTE_AVX_TLJ.pdf, LatestRevisionDate=19.12.2013, Mounted=Yes, Part Description="ESR 0R5 Solid Tantalum Chip Capacitor", Part Number=CTE3216-18_100UF_6.3V_20%_ESR0500_AVX_TLJ, Pin Count=2, Sense=No, SMD=Yes, Socket=No, Status=None
C7 C8 C10 C13 C14 C15 C16 C22 C24 C27: library part CC0402_100NF_50V_10%_X7R, "Non-polarised capacitor", Case=0402, Manufacturer=GENERIC, Manufacturer1 ComponentHeight=0.55mm, Manufacturer1 Example=MURATA, Manufacturer1 Part Number=GRM155R71H104KE14D, Tolerance=±10%, Voltage=50V, Author="CERN DEM MR", Component Type=Standard, CreateDate=6/30/2017, HelpURL=\\cern.ch\dfs\Applications\Altium\Datasheets\CC0402_MURATA_GRM155R71H104KE14D.pdf, LatestRevisionDate=6/30/2017, Manufacturer Part Number=CC0402_100NF_50V_10%_X7R, Mounted=Yes, Part Description="SMD Multilayer Chip Ceramic Capacitor", Part Number=CC0402_100NF_50V_10%_X7R, Pin Count=2, Sense=No, SMD=Yes, Socket=No, Status=None, TC=X7R
C9 C23: library part CTE3216-18_33UF_4V_10%, "Polarised capacitor", Case=A, Manufacturer=GENERIC, Manufacturer1 ComponentHeight=1.8mm, Manufacturer1 Example=AVX, Manufacturer1 Part Number=TAJA336K004R, Tolerance=±10%, Voltage=4V, Author="CERN DEM JLC", Component Type=Standard, CreateDate=03.12.2007, HelpURL=\\cern.ch\dfs\Applications\Altium\Datasheets\CTE_AVX_TAJ.pdf, LatestRevisionDate=03.12.2007, Manufacturer Part Number=CTE3216-18_33UF_4V_10%, Mounted=Yes, Part Description="Solid Tantalum Chip Capacitor", Part Number=CTE3216-18_33UF_4V_10%, Pin Count=2, Sense=No, SMD=Yes, Socket=No, Status=Preferred
C17: library part CTE3528-21_220UF_2.5V_10%, "Polarised capacitor", Case=B, Manufacturer=GENERIC, Manufacturer1 ComponentHeight=2.1mm, Manufacturer1 Example=AVX, Manufacturer1 Part Number=TAJB227K002R, Tolerance=±10%, Voltage=2.5V, Author="CERN DEM JLC", Component Type=Standard, CreateDate=03.12.2007, HelpURL=\\cern.ch\dfs\Applications\Altium\Datasheets\CTE_AVX_TAJ.pdf, LatestRevisionDate=03.12.2007, Manufacturer Part Number=CTE3528-21_220UF_2.5V_10%, Mounted=Yes, Part Description="Solid Tantalum Chip Capacitor", Part Number=CTE3528-21_220UF_2.5V_10%, Pin Count=2, Sense=No, SMD=Yes, Socket=No, Status=Preferred
D5: "Schottky Diode", Case=SOD-323, Manufacturer=INFINEON, Power=750mA, Voltage=40V, Author="CERN DEM JLC", Bonding=No, Component Type=Standard, ComponentHeight=1.1mm, CreateDate=12.11.2014, Device=BAT165, HelpURL=\\cern.ch\dfs\Applications\Altium\Datasheets\BAT165.pdf, LatestRevisionDate=12.11.2014, Manufacturer Part Number=BAT165, Mounted=Yes, PackageDescription="Small Outline Diode (SOD-323), 1.70mm W X 1.25mm L X 1.10mm H body,  IPC Medium Density", Part Description="Medium Power AF Schottky Diode", Part Number=BAT165, Pin Count=2, PressFit=No, Sense=No, SMD=Yes, Socket=No
IC1: library part TDC-GPX2, "4 Channel Time to Digital Converter", Case=QFP64, Manufacturer=AMS, Author="CERN DEM MR", Bonding=No, Component Type=Standard, ComponentHeight=1.6mm, CreateDate=4/23/2019, Device="TDC-GPX2 FLQM", HelpURL=\\cern.ch\dfs\Applications\Altium\Datasheets\AMS_TDC-GPX2.pdf, LatestRevisionDate=4/5/2024, Manufacturer Part Number="TDC-GPX2 FLQM", Mounted=Yes, PackageDescription="QFP, 0.50mm Pitch, Square; 64 Pin, 10.0mm L X 10.0mm W X 1.60mm H Body, IPC Medium Density", Part Description="4 Channel Time to Digital Converter", Part Number=TDC-GPX2, Pin Count=64, PressFit=No, Sense=No, SMD=Yes, Socket=No
IC2 IC7: "600mA CMOS Low Dropout Linear Regulator with Enable", Case=SOT25, Manufacturer="DIODES INCORPORATED", Manufacturer Part Number=AP2112K-3.3, Author="CERN DEM MR", Bonding=No, Component Type=Standard, ComponentHeight=1.4mm, CreateDate=13.12.2017, Device=AP2112K-3.3TRG1, HelpURL=\\cern.ch\dfs\Applications\Altium\Datasheets\AP2112K-3.3TRG1.pdf, LatestRevisionDate=27.06.2022, Mounted=Yes, PackageDescription="SOT23, 0.95mm Pitch; 5 Pin, 1.6mm W X 3.0mm L X 1.40mm H body, IPC Medium Density", Part Description="3.3V 600mA CMOS Low Dropout Linear Regulator with Enable", Part Number=AP2112K-3.3TRG1, Pin Count=5, PressFit=No, Sense=No, SMD=Yes, Socket=No
IC3: "MAX V 1.8V CPLD, 54 IOs, 160 Logic Elements, 64-Pin EQFP, Automotive Temperature, Speed Grade 5, Pb-Free", Case=QFP64, Manufacturer=ALTERA, Author="CERN DEM JLC", Bonding=No, Component Type=Standard, ComponentHeight=1.2mm, ComponentLink1Description="Package Drawing", ComponentLink1URL=\\cern.ch\dfs\Applications\Altium\Datasheets\5M160ZE64A5N_Package.pdf, ComponentLink2Description=Pinout, ComponentLink2URL=\\cern.ch\dfs\Applications\Altium\Datasheets\5M160ZE64A5N_Pinout.pdf, CreateDate=07.01.2015, Device=5M160ZE64A5N, HelpURL=\\cern.ch\dfs\Applications\Altium\Datasheets\5M160ZE64A5N.pdf, LatestRevisionDate=27.10.2022, Manufacturer Part Number=5M160ZE64A5N, Mounted=Yes, PackageDescription="QFP, 0.40mm Pitch, Square; 64 pin, 7.00mm L X 7.00mm W X 1.20mm H body (w/Thermal Tab 5.50 X 5.50mm), IPC Medium Density", Part Description="MAX V 1.8V CPLD, 54 IOs, 160 Logic Elements, 64-Pin EQFP, Automotive Temperature, Speed Grade 5, Pb-Free", Part Number=5M160ZE64A5N, Pin Count=65, PressFit=No, Sense=No, SMD=Yes, Socket=No, Status="Not Recommended"
IC4: "600mA CMOS Low Dropout Linear Regulator with Enable", Case=SOT25, Manufacturer="DIODES INCORPORATED", Manufacturer Part Number=AP2112K-1.8, Author="CERN DEM JLC", Bonding=No, Component Type=Standard, ComponentHeight=1.4mm, CreateDate=13.06.2018, Device=AP2112K-1.8TRG1, HelpURL=\\cern.ch\dfs\Applications\Altium\Datasheets\AP2112K-1.8TRG1.pdf, LatestRevisionDate=27.06.2022, Mounted=Yes, PackageDescription="SOT23, 0.95mm Pitch; 5 Pin, 1.6mm W X 3.0mm L X 1.40mm H body, IPC Medium Density", Part Description="1.8V 600mA CMOS Low Dropout Linear Regulator with Enable", Part Number=AP2112K-1.8TRG1, Pin Count=5, PressFit=No, Sense=No, SMD=Yes, Socket=No
IC27: "Single Bus Buffer Gate With 3-State Output", Case=SOT353, Manufacturer="TEXAS INSTRUMENTS", Author="CERN DEM JLC", Bonding=No, Component Type=Standard, ComponentHeight=1.1mm, CreateDate=12/19/2011, Device=SN74LVC1G125DCKT, HelpURL=\\cern.ch\dfs\Applications\Altium\Datasheets\SN74LVC1G125DCKT.pdf, LatestRevisionDate=12/19/2011, Manufacturer Part Number=SN74LVC1G125DCKT, Mounted=Yes, PackageDescription="SOT353, SC70-5, SOT, 0.65mm Pitch, 5 pin, 1.25mm W X 2.00mm L X 1.10mm H, IPC Medium Density", Part Description="Single Bus Buffer Gate With 3-State Outputs", Part Number=SN74LVC1G125DCKT, Pin Count=5, PressFit=No, Sense=No, SMD=Yes, Socket=No
J1 J2 J3 J5 J6: library part AMPHENOL_919-109J-51PX, Manufacturer=AMPHENOL, Manufacturer Part Number="919-109J-51PX (MCX6251B1-3GT30G-50)", Author="CERN DEM BC", Component Type=Standard, ComponentHeight=6.06mm, CreateDate=31.01.2019, Family=MCX, HelpURL=\\cern.ch\dfs\Applications\Altium\Datasheets\AMPHENOL_919-109J-51PX.pdf, LatestRevisionDate=31.01.2019, Mounted=Yes, Part Description="50 Ohms, RF Connector, MCX Straight PCB Receptacle Jack", Part Number=AMPHENOL_919-109J-51PX, Pin Count=5, PressFit=No, Sense=No, SMD=No, Socket=No, Status=None
J4 J10: library part "PCB Edge Connector 12 (2x6)", "PCB Edge Connector 12 (2x6)", Part Number=EDGE10T1B6_P200W1000L0F100X400, Author="CERN DEM MR", Component Type="Standard (No BOM)", ComponentHeight=0mm, CreateDate=14.02.2018, HelpURL=\\cern.ch\dfs\Applications\Altium\Datasheets\EDGE10T1B6_P200W1000L0F100X400.pdf, LatestRevisionDate=14.02.2018, Mounted=No, Part Description="10 Contacts Board Edge Connector, Pitch 2mm, Length 0mm, Width 10mm, Finger Lenght 4mm, Finger Width 1mm", Pin Count=12, PressFit=No, Sense=No, SMD=No, Socket=No, Status=None
J9 J11: library part "PCB Edge Connector 12 (2x6) R", "PCB Edge Connector 12 (2x6)", Part Number=EDGE12T5B10_P200W1000L0F100X400, Author=GK, Component Type="Standard (No BOM)", ComponentHeight=0mm, CreateDate=14.02.2018, HelpURL=\\cern.ch\dfs\Applications\Altium\Datasheets\EDGE10T5B10_P200W1000L0F100X400.pdf, LatestRevisionDate=14.02.2018, Mounted=No, Part Description="12 Contacts Board Edge Connector, Pitch 2mm, Length 0mm, Width 10mm, Finger Lenght 4mm, Finger Width 1mm", Pin Count=12, PressFit=No, Sense=No, SMD=No, Socket=No, Status=None
J9R J100: library part EDGE10T5B10_P200W1000L0F100X400, "PCB Edge Connector 10 (2x5)", Author="CERN DEM MR", Component Type="Standard (No BOM)", ComponentHeight=0mm, CreateDate=14.02.2018, HelpURL=\\cern.ch\dfs\Applications\Altium\Datasheets\EDGE10T5B10_P200W1000L0F100X400.pdf, LatestRevisionDate=14.02.2018, Mounted=No, Part Description="10 Contacts Board Edge Connector, Pitch 2mm, Length 0mm, Width 10mm, Finger Lenght 4mm, Finger Width 1mm", Part Number=EDGE10T5B10_P200W1000L0F100X400, Pin Count=10, PressFit=No, Sense=No, SMD=No, Socket=No, Status=None
J11L J12: library part EDGE10T1B6_P200W1000L0F100X400, "PCB Edge Connector 10 (2x5)", Author="CERN DEM MR", Component Type="Standard (No BOM)", ComponentHeight=0mm, CreateDate=14.02.2018, HelpURL=\\cern.ch\dfs\Applications\Altium\Datasheets\EDGE10T1B6_P200W1000L0F100X400.pdf, LatestRevisionDate=14.02.2018, Mounted=No, Part Description="10 Contacts Board Edge Connector, Pitch 2mm, Length 0mm, Width 10mm, Finger Lenght 4mm, Finger Width 1mm", Part Number=EDGE10T1B6_P200W1000L0F100X400, Pin Count=10, PressFit=No, Sense=No, SMD=No, Socket=No, Status=None
J13: "TC2030-MCP and TC2050-IDC Pad Contact", Author="CERN DEM HF", Component Type="Standard (No BOM)", ComponentHeight=0mm, CreateDate=02.05.2024, Family=TC2050-IDC, HelpURL=\\cern.ch\dfs\Applications\Altium\Datasheets\TC2050-IDC.pdf, LatestRevisionDate=02.05.2024, Mounted=No, PackageDescription="10 X 31mil Diameter SMD Pad For TC2030-MCP Legged Connector", Part Description="10 X 31mil Diameter SMD Pad For TC2050-IDC Legged Connector", Part Number=TC2050-IDC, Pin Count=10, Sense=No, SMD=Yes, Socket=No, Status=None
J98 J99: library part AVX_009159012761916, "Open Ended Card Edge Connector, 9159 Series", Manufacturer=AVX, Manufacturer Part Number=009159012761916, Part Number=AVX_0009159012761916, Author=GK, Component Type=Standard, ComponentHeight=1.6mm, CreateDate=13.02.2018, HelpURL="\\cern.ch\dfs\Applications\Altium\Datasheets\AVX_00 9159 010 061 916.pdf", LatestRevisionDate=13.02.2018, Mounted=Yes, Part Description="10 Contacts, 2mm Pitch, Open Ended Card Edge Connector, 9159 Series", Pin Count=12, PressFit=No, Sense=No, SMD=No, Socket=No, Status=None
LD1 LD2 LD18 LD19 LD20 LD21: library part LED_KINGBRIGHT_KP-1608CGCK, "LED Green 1C 2A", Case=0603, Manufacturer=KINGBRIGHT, Manufacturer Part Number=KP-1608CGCK, Author="CERN DEM HF", Bonding=No, Color=Green, Component Type=Standard, ComponentHeight=1.1mm, HelpURL=\\cern.ch\dfs\Applications\Altium\Datasheets\LED_KINGBRIGHT_KP-1608CGCK.pdf, Mounted=Yes, PackageDescription="SMT Green LED, Case 0603, Body L 1.60mm x W 0.80mm x H 1.10mm", Part Description="1.6x0.8mm SMD Chip Green LED Lamp", Part Number=LED_KINGBRIGHT_KP-1608CGCK, Pin Count=2, PressFit=No, Sense=No, SMD=Yes, Socket=No
  LD1 LD18 LD19 LD20 LD21: CreateDate=01.10.2021, LatestRevisionDate=01.10.2021
  LD2: CreateDate=10/1/2021, LatestRevisionDate=10/1/2021
MP1 MP2 MP3 MP4: library part 97730306330R, "WA-SMSI SMT Steel Spacer with internal Thread Bottom closed, OD 3.3mm, M1.6 x 3mm", Manufacturer="Wurth Elektronik", Operating Temperature Max=150°C, Operating Temperature Min=-55°C, Category="SMT Spacers", ComponentLink1Description="Website Link", ComponentLink1URL=https://www.we-online.com/redexpert/article/97730306330R?ad, ComponentLink2Description="Datasheet Link", ComponentLink2URL=https://www.we-online.com/redexpert/spec/97730306330R?ad, Height=3mm, Inside Thread Length=1.8mm, Manufacturer Part Number=97730306330R, Match Code=WA-SMSI, Material=Steel, Mount="Surface Mount", Outside Diameter=3.3mm, Packaging="Tape and Reel", Surface=Tin, Thread Size=M1.6
NT1 NT2 NT3 NT4 NT5 NT6 NT7 NT9 NT10 NT11 NT12 NT13: library part "Net Tie 3", Author="CERN DEM HF", Component Type="Net Tie", ComponentHeight=0mm, CreateDate=23.09.2024, Family="Net Tie", HelpURL=Undefined, LatestRevisionDate=23.09.2024, Mounted=No, PackageDescription="SMD Net Tie", Part Description="Net Tie (2 Nets)", Part Number="Net Tie 3", Pin Count=2, Sense=No, SMD=No, Socket=No, Status=None
Q1: library part XTAL_10MHZ_ABRACON_ABMM2-10.000MHZ-E2-T, "Crystal 4 pins 1=XTAL Control 2=GND3=XTAL 4=GND", Manufacturer=ABRACON, Manufacturer Part Number=ABMM2-10.000MHZ-E2-T, Author="CERN DEM MR", Bonding=No, Component Type=Standard, ComponentHeight=1.2mm, CreateDate=12/10/2015, HelpURL=\\cern.ch\dfs\Applications\Altium\Datasheets\XTAL_ABRACON_ABMM2.pdf, LatestRevisionDate=12/10/2015, Mounted=Yes, PackageDescription="4 Pins,  6mm L X 3.5mm H, SMD Low Profile Crystal, ABMM2 Serie", Part Description="Tolerance: ±20ppm, -20°C to +70°C, 18pF, SMD Crystal, ABMM2 Series", Part Number=XTAL_10MHZ_ABRACON_ABMM2-10.000MHZ-E2-T, Pin Count=4, PressFit=No, Sense=No, SMD=Yes, Socket=No
R1 R3 R4 R5 R7 R8 R12 R14 R17: library part R0402_100K_1%_0.0625W_100PPM, "Resistor - 1%", Case=0402, Manufacturer=GENERIC, Manufacturer1 ComponentHeight=0.4mm, Manufacturer1 Example="YAGEO PHYCOMP", Manufacturer1 Part Number=232270671004L, Power=0.0625W, Tolerance=±1%, Author="CERN DEM JLC", Component Type=Standard, CreateDate=12/3/2007, HelpURL=\\cern.ch\dfs\Applications\Altium\Datasheets\R0402_Phycomp_RC0402.pdf, LatestRevisionDate=10/17/2012, Manufacturer Part Number=R0402_100K_1%_0.0625W_100PPM, Mounted=Yes, Part Description="General Purpose Thick Film Chip Resistor", Part Number=R0402_100K_1%_0.0625W_100PPM, Pin Count=2, PressFit=No, Sense=No, SMD=Yes, Socket=No, Status="Not Recommended", TC=±100ppm/°C
R2 R9 R15 R18 R19: library part R1210_49R9_1%_0.5W_100PPM_VISHAY_CRCW, "Resistor - 1%", Case=1210, Manufacturer="VISHAY DRALORIC", Manufacturer Part Number=CRCW121049R9FK, Power=0.5W, Tolerance=±1%, Author="CERN DEM JMW", Component Type=Standard, ComponentHeight=0.7mm, CreateDate=8/6/2014, HelpURL=\\cern.ch\dfs\Applications\Altium\Datasheets\R1210_VISHAY_CRCW1210.pdf, LatestRevisionDate=8/6/2014, Mounted=Yes, Part Description="Thick Film Chip Resistor", Part Number=R1210_49R9_1%_0.5W_100PPM_VISHAY_CRCW, Pin Count=2, PressFit=No, Sense=No, SMD=Yes, Socket=No, Status=None, TC=±100ppm/°C
R6 R24 R25 R26 R27 R32 R33 R34: library part R0402_3K3_1%_0.0625W_100PPM, "Resistor - 1%", Case=0402, Manufacturer=GENERIC, Manufacturer1 ComponentHeight=0.4mm, Manufacturer1 Example="YAGEO PHYCOMP", Manufacturer1 Part Number=232270673302L, Power=0.0625W, Tolerance=±1%, Author="CERN DEM JLC", Component Type=Standard, CreateDate=03.12.2007, HelpURL=\\cern.ch\dfs\Applications\Altium\Datasheets\R0402_Phycomp_RC0402.pdf, LatestRevisionDate=17.10.2012, Manufacturer Part Number=R0402_3K3_1%_0.0625W_100PPM, Mounted=Yes, Part Description="General Purpose Thick Film Chip Resistor", Part Number=R0402_3K3_1%_0.0625W_100PPM, Pin Count=2, PressFit=No, Sense=No, SMD=Yes, Socket=No, Status="Not Recommended", TC=±100ppm/°C
R10: library part R0402_1M_1%_0.0625W_100PPM, "Resistor - 1%", Case=0402, Manufacturer=GENERIC, Manufacturer1 ComponentHeight=0.4mm, Manufacturer1 Example="YAGEO PHYCOMP", Manufacturer1 Part Number=232270671005L, Power=0.0625W, Tolerance=±1%, Author="CERN DEM JLC", Component Type=Standard, CreateDate=12/3/2007, HelpURL=\\cern.ch\dfs\Applications\Altium\Datasheets\R0402_Phycomp_RC0402.pdf, LatestRevisionDate=10/17/2012, Manufacturer Part Number=R0402_1M_1%_0.0625W_100PPM, Mounted=Yes, Part Description="General Purpose Thick Film Chip Resistor", Part Number=R0402_1M_1%_0.0625W_100PPM, Pin Count=2, PressFit=No, Sense=No, SMD=Yes, Socket=No, Status="Not Recommended", TC=±100ppm/°C
R20 R21 R22 R23: library part R0402_10R_1%_0.0625W_200PPM, "Resistor - 1%", Case=0402, Manufacturer=GENERIC, Manufacturer1 ComponentHeight=0.4mm, Manufacturer1 Example="YAGEO PHYCOMP", Manufacturer1 Part Number=232270671009L, Power=0.0625W, Tolerance=±1%, Author="CERN DEM JLC", Component Type=Standard, CreateDate=24.06.2009, HelpURL=\\cern.ch\dfs\Applications\Altium\Datasheets\R0402_Phycomp_RC0402.pdf, LatestRevisionDate=17.10.2012, Manufacturer Part Number=R0402_10R_1%_0.0625W_200PPM, Mounted=Yes, Part Description="General Purpose Thick Film Chip Resistor", Part Number=R0402_10R_1%_0.0625W_200PPM, Pin Count=2, PressFit=No, Sense=No, SMD=Yes, Socket=No, Status="Not Recommended", TC=±200ppm/°C
SW2: library part SW_OMRON_A6H-4102, "4 Ways SPST DIP Switch", Manufacturer=OMRON, Manufacturer Part Number=A6H-4102, Author="CERN DEM JLC", Component Type=Standard, ComponentHeight=1.45mm, CreateDate=17.12.2013, Family=Switch, HelpURL=\\cern.ch\dfs\Applications\Altium\Datasheets\SW_OMRON_A6H-4102.pdf, LatestRevisionDate=17.12.2013, Mounted=Yes, PackageDescription="Pitch 1.27mm, Body 6.31 x 4.5mm, 4 Ways SPST Surface-Mounting DIP Switch, OMRON A6H", Part Description="4 Ways Ultra-low Profile, Half-pitch, SPST DIP Switch with Seal Tape, Rating 25mA 24VDC", Part Number=SW_OMRON_A6H-4102, Pin Count=8, PressFit=No, Sense=No, SMD=Yes, Socket=No, Status=None
T1 T2 T3 T4 T5 T6: "N-CHANNEL MOSFET WITH DIODE", Case=SOT23-3, Manufacturer="FAIRCHILD SEMICONDUCTOR", Author="CERN DEM JLC", Bonding=No, Component Type=Standard, ComponentHeight=1.3mm, CreateDate=8/20/2008, Device=2N7002, HelpURL=\\cern.ch\dfs\Applications\Altium\Datasheets\2N7002.pdf, LatestRevisionDate=4/7/2009, Manufacturer Part Number=2N7002, Mounted=Yes, PackageDescription="SOT23, 0.95mm Pitch; 3 Pin, 1.30mm W X 2.90mm L X 1.30mm H body, IPC Medium Density", Part Description="60V, 280mA, N-Channel Enhancement Mode Field Effect Transistor (FET)", Part Number=2N7002, Pin Count=3, PressFit=No, Sense=No, SMD=Yes, Socket=No

## Via types
v1: diameter 0.5, hole 0.2, L1 to L4, tented both sides, 505 vias
v2: diameter 0.5, hole 0.2, L1 to L4, 1 vias

## Nets (pads, with @x,y where several pads share a name; then routed paths per layer and width w, separated by ;. In a path a pad name is that pad's centre, name@x,y a point inside that pad or via, vN(x,y) a via of type N, cw(c..) or ccw(c..) an arc to the next point about the centre after c; other vN are vias at no path point)
CS_ID0: IC3.5 R26.2 SW2.4 | length 11.3
  L1 w0.13: v1(15.922,55.809) 16.781,55.809 17,55.59 SW2.4@17,54.63
  L4 w0.13: IC3.5@13.188,52.715 13.188,53.841 13.033,53.996 13.033,54.535 12.777,54.79 12.777,55.236 12.754,55.26 12.754,55.79 12.688,55.855 12.688,56.231 12.954,56.496 13.03,56.496 13.345,56.811 13.871,56.811 ; 13.872,56.811 14.33,56.811 15.255,57.735 R26.2@15.275,57.735 15.275,56.455 v1(15.922,55.809)
CS_ID1: IC3.4 R27.2 SW2.3 | length 10.6
  L1 w0.13: v1(12.3,55.59) 14.852,55.59 15.047,55.395 15.211,55.395 15.73,54.875 SW2.3@15.73,54.63
  L4 w0.13: v1(12.3,55.59) v1@12.474,55.59 ; IC3.4@12.788,52.715 12.788,53.778 12.706,53.861 12.706,54.466 12.498,54.674 12.498,55.12 12.474,55.144 v1@12.474,55.59 ; R27.2@14.185,57.735 14.185,57.207 14.068,57.09 13.902,57.09 13.899,57.094 13.233,57.094 12.915,56.776 12.838,56.776 12.409,56.346 12.409,55.74 12.474,55.674 v1@12.474,55.59
CS_ID2: IC3.3 R32.2 SW2.2 | length 8.8
  L1 w0.13: v1(12.229,54) 12.296,53.933 12.595,53.933 12.726,53.802 13.654,53.802 13.773,53.921 13.773,54.51 13.894,54.63 SW2.2@14.46,54.63
  L4 w0.13: IC3.3@12.388,52.715 12.388,53.716 12.379,53.725 12.379,54 12.219,54.16 12.219,55.004 12.04,55.183 12.04,55.209 11.847,55.402 11.847,56.18 12.722,57.055 12.732,57.055 12.98,57.303 12.98,57.545 13.17,57.735 R32.2@13.19,57.735
CS_ID3: IC3.2 R33.2 SW2.1 | length 6.9
  L1 w0.13: v1(11.761,54.588) 11.804,54.63 SW2.1@13.19,54.63
  L4 w0.13: IC3.2@11.988,52.715 11.988,53.566 11.752,53.802 11.752,54.198 11.845,54.29 11.845,54.492 11.851,54.498 v1(11.761,54.588) 11.761,55.093 11.568,55.286 11.568,56.848 12.069,57.349 12.069,57.369 12.283,57.582 R33.2@12.303,57.582
CVDD18: C17.1 C22.2 IC1.29 R22.2 | length 8.5
  L4 w0.3: IC1.29@33.2,32.25 34.35,32.25 34.65,32.55 C22.2@35.5,32.55 39.1,32.55 39.23,32.42 R22.2@39.23,30.1
DVDD18: C12.1 C13.2 C14.2 IC1.22 IC1.24 IC1.25 IC1.26 IC1.60 R20.1 R22.1 | length 18.3
  L1 w0.5: C12.1@33.4,34.6 36.15,34.6 ; v1(36.15,35.45) 36.15,34.6 ; v1(40.9,30.1) R20.1@40.17,30.1 40.17,33.33 38.9,34.6 36.15,34.6
  L4 w0.3: C13.2@19.5,36.55 20.15,36.55 20.45,36.25 IC1.60@21.8,36.25 ; IC1.22@33.2,35.75 34.55,35.75 34.85,35.45 C14.2@35.5,35.45 v1(36.15,35.45)
  L4 w0.5: R22.1@40.17,30.1 v1(40.9,30.1)
  other v1: 31.4,34.2 31.4,34.9 31.4,35.6
DVDD33: C15.2 C16.2 C26.2 IC1.20 IC1.61 IC2.5 R21.1 R23.1 | length 68.6
  L4 w0.3: IC1.61@21.8,36.75 20.75,36.75 20.3,37.2 20.3,37.65 20.087,37.863 20.087,37.875 19.925,38.037 19.913,38.037 C15.2@19.5,38.45 19.813,38.763 19.925,38.763 22.662,41.5 35.3,41.5 38.3,38.5 ; IC1.20@33.2,36.75 34.25,36.75 34.85,37.35 C16.2@35.5,37.35 v1(36.15,37.35) 37.15,37.35 38.3,38.5 ; 40.17,38.5 38.3,38.5
  L4 w0.6: IC2.5@37.45,52.2 37.45,51.95 37.05,51.55 C26.2@36.1,51.55 36.1,50.3 40.17,46.23 40.17,38.5 R23.1@40.17,37.4 43.7,37.4 44.6,36.5 44.6,27.3 43.9,26.6 R21.1@40.17,26.6